# Altium PCB QS30.PcbDoc (part 1 of 2)
Units mil, origin at the board's own origin, x right, y up, seen from the top; angles counter-clockwise.
Board outline 3448.82 x 1825 mil, 2 copper layers (Top Layer, Bottom Layer); 106 components, 114 nets, 350 pads, 148 vias.
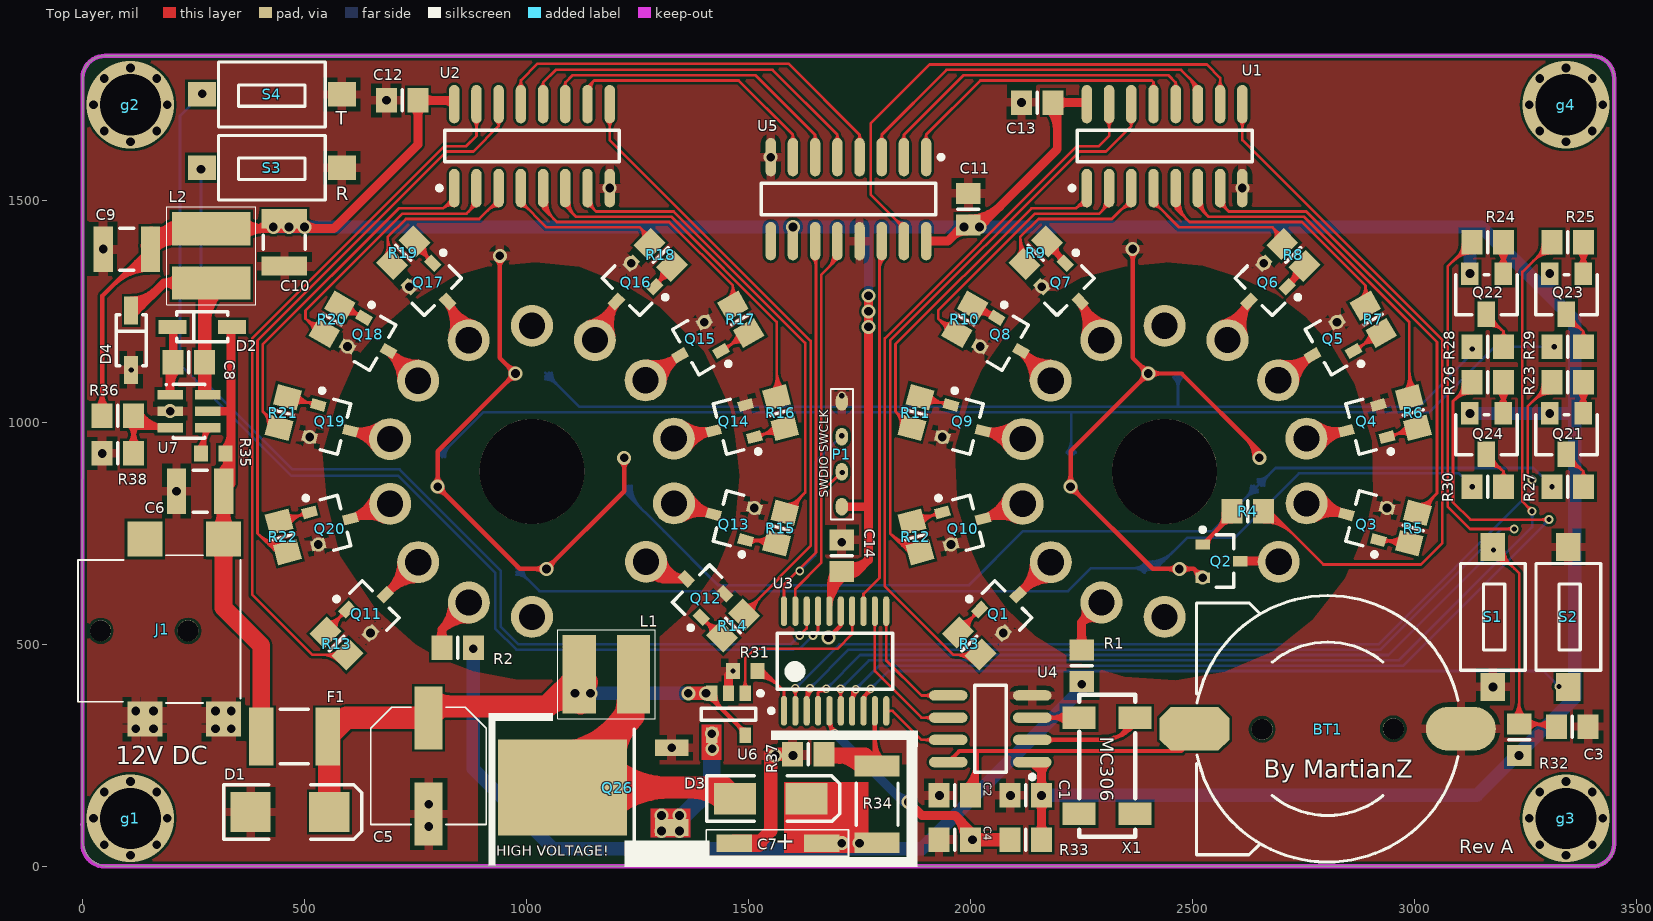
[diagram p0: Top Layer view]
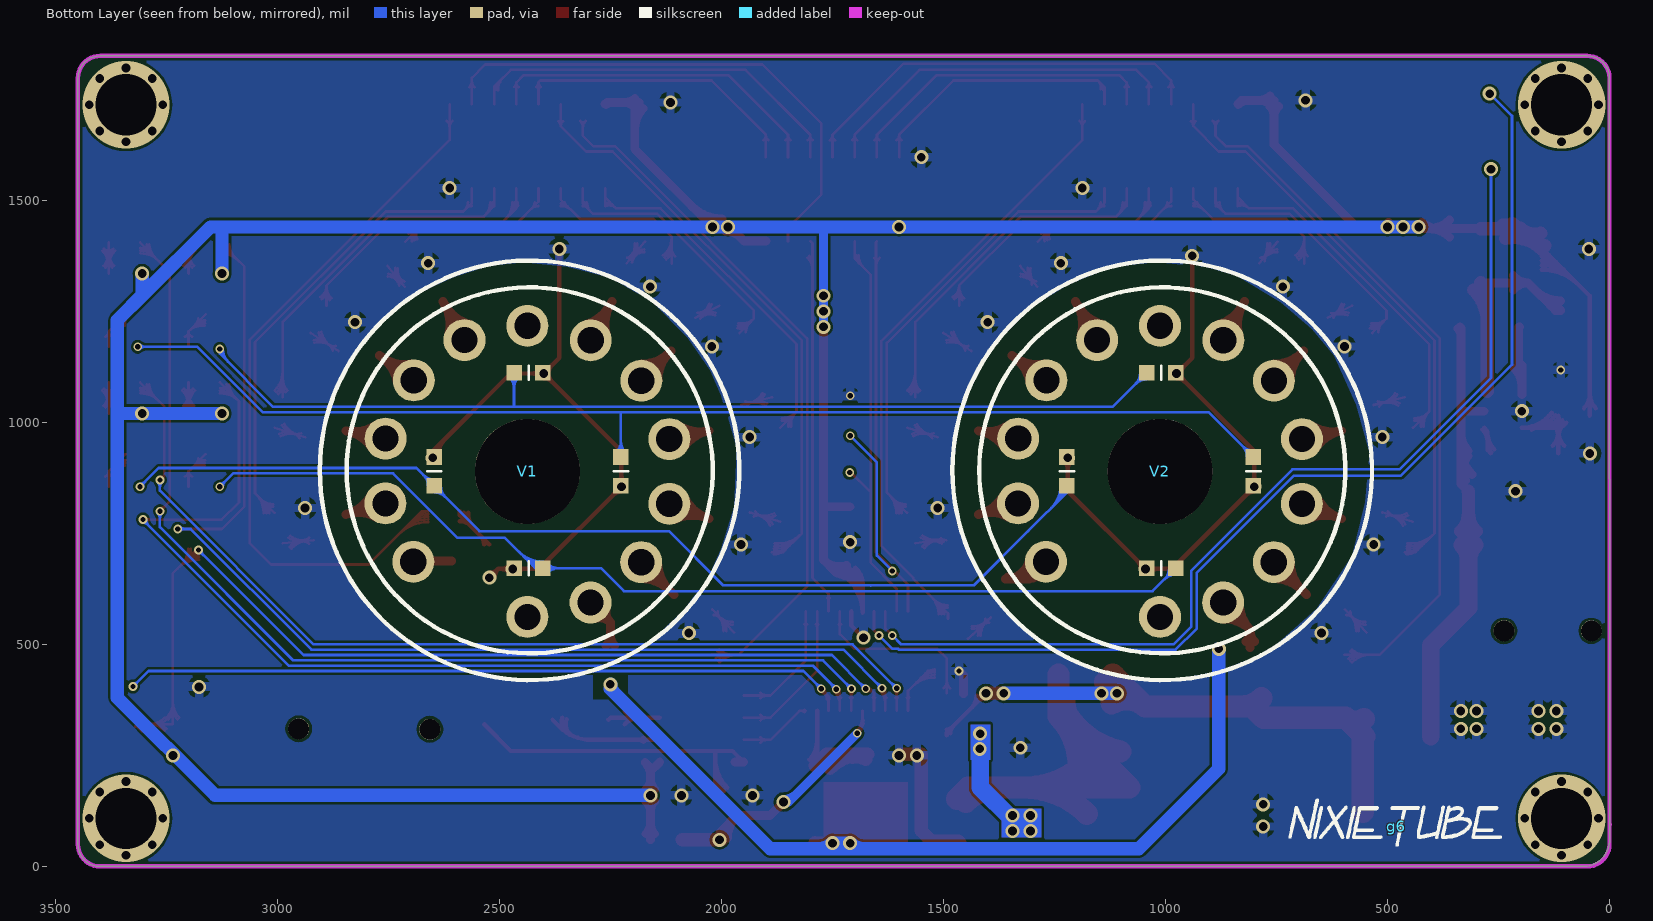
[diagram p1: Bottom Layer view, seen from below]

## Layer stack, top to bottom
Top Layer: signal copper 1.4
Dielectric: dielectric 12.6, FR-4, Dk 4.8
Bottom Layer: signal copper 1.4

## Board outline
0.32,1685 0.32,1775 cw(c50.32,1775) 50.32,1825 3398.82,1825 cw(c3398.82,1775) 3448.82,1775 3448.82,50 cw(c3398.82,50) 3398.82,0 60,0 cw(c60,60) 0,60

## Design rules (kind name [scope] priority, off if disabled: settings)
Clearance [All] p1: gap=6
HoleSize [All] p1: absolutevalues=TRUE maxlimit=300 minlimit=1 maxpercent=80.000 minpercent=20.000
HoleToHoleClearance [All] p1: gap=3 allowstackedmicrovias=TRUE
MinimumSolderMaskSliver [All] p1: minsoldermaskwidth=1
PolygonConnect [All] p1: connectstyle=Relief reliefconductorwidth=20 reliefentries=4 polygonreliefangle="90 Angle" airgapwidth=10
RoutingVias [All] p1: holewidth=28 width=50 viastyle="Through Hole" minholewidth=28 minwidth=50 maxholewidth=28 maxwidth=50
SilkToSilkClearance [All] p1: silktosilkclearance=0
SilkscreenOverComponentPads [All] p1: minsilkscreentomaskgap=0
SolderMaskExpansion [All] p1: expansion=4
Width [All] p1: maxlimit=100 minlimit=6 preferedwidth=10
23 further rules are at their usual default settings.

## Classes and differential pairs
component class QS30-MCU: BT1 C1 C2 C3 C4 C10 C11 C12 C13 C14 P1 R31 R32 R33 S1 S2 S3 S4 U3 U4 X1
component class QS30-Main: Q1 Q2 Q3 Q4 Q5 Q6 Q7 Q8 Q9 Q10 Q11 Q12 Q13 Q14 Q15 Q16 Q17 Q18 Q19 Q20 Q21 Q22 Q23 Q24 R1 R2 R3 R4 R5 R6 R7 R8 R9 R10 R11 R12 R13 R14 R15 R16 R17 R18 R19 R20 R21 R22 R23 R24 R25 R26 R27 R28 R29 R30 U1 U2 U5 V1 V2
component class QS30-HV: C5 C6 C7 C8 C9 D1 D2 D3 D4 F1 g1 g2 g3 g4 g6 J1 L1 L2 Q26 R34 R35 R36 R37 R38 U6 U7

## Components (designator, comment, footprint, x,y, rotation, side; value= is the part's Value field where it differs from the comment)
BT1 "Battery" BAT 2504.25,310 r90 top
C1 "Cap" 6-0805_N 2124.25,160 r180 top
C2 "Cap" 6-0805_N 1964.25,160 r180 top
C3 "100nF" 6-0805_N 3355,315 r180 top
C4 "Cap" 6-0805_N 1964.25,60 r0 top
C5 "EL" 220UF_16V_SMD_CAP 850.39,354.33 r0 top
C6 "" C1210 265,845 r180 top
C7 "Cap Pol1" "C10.2 - SMD" 1664.88,52.52 r180 top
C8 "Cap" 6-0805_N 240,1135 r180 top
C9 "Cap" C1210 100,1390 r0 top
C10 "Cap" C1210 455,1405 r90 top
C11 "Cap" 6-0805_N 1995,1480 r270 top
C12 "Cap" 6-0805_N 720,1725 r0 top
C13 "Cap" 6-0805_N 2150,1720 r0 top
C14 "Cap" 6-0805_N 1710,700 r270 top
D1 "SMBJ13CA" SMB 467.4,122.52 r0 top
D2 "B230A" SOD123 270,1215 r180 top
D3 "FR107" DSO-C2/X1.8 1549.88,152.52 r0 top
D4 "B230A" SOD123 110,1185 r90 top
F1 "Fuse 2" 1812 477.4,292.52 r0 top
g1 "g固定过孔" 固定过孔 108.27,108.27 r0 top
g2 "g固定过孔" 固定过孔 108.27,1715 r0 top
g3 "g固定过孔" 固定过孔 3340.55,108.27 r0 top
g4 "g固定过孔" 固定过孔 3340.55,1715 r0 top
g6 "g固定过孔" "PCBComponent_1 - duplicate3" 480,90 r180 bottom
J1 "KLD-0202-B" DC_JACK_SMT_4.0_1.7 -10,690 r270 top
L1 "GDCD4532" GDCD4532 1179.88,432.52 r0 top
L2 "CDRH6D38T125" GDCD4532 290,1375 r90 top
P1 "Header 4" SWD_DOWNLOAD 1710,810 r90 top
Q1 "MMBTA42" SOT-23B_L 2076.77,581.89 r45 top
Q2 "MMBTA42" SOT-23B_L 2564.88,687.52 r0 top
Q3 "MMBTA42" SOT-23B_L 2886.77,781.89 r165 top
Q4 "MMBTA42" SOT-23B_L 2886.77,991.89 r195 top
Q5 "MMBTA42" SOT-23B_L 2806.77,1171.89 r210 top
Q6 "MMBTA42" SOT-23B_L 2656.77,1301.89 r225 top
Q7 "MMBTA42" SOT-23B_L 2216.77,1301.89 r315 top
Q8 "MMBTA42" SOT-23B_L 2076.77,1181.89 r330 top
Q9 "MMBTA42" SOT-23B_L 1986.77,991.89 r345 top
Q10 "MMBTA42" SOT-23B_L 1986.77,771.89 r15 top
Q11 "MMBTA42" SOT-23B_L 652.36,581.89 r45 top
Q12 "MMBTA42" SOT-23B_L 1389.88,617.52 r135 top
Q13 "MMBTA42" SOT-23B_L 1462.36,781.89 r165 top
Q14 "MMBTA42" SOT-23B_L 1462.36,991.89 r195 top
Q15 "MMBTA42" SOT-23B_L 1382.36,1171.89 r210 top
Q16 "MMBTA42" SOT-23B_L 1232.36,1301.89 r225 top
Q17 "MMBTA42" SOT-23B_L 792.36,1301.89 r315 top
Q18 "MMBTA42" SOT-23B_L 652.36,1181.89 r330 top
Q19 "MMBTA42" SOT-23B_L 562.36,991.89 r345 top
Q20 "MMBTA42" SOT-23B_L 562.36,771.89 r15 top
Q21 "9012 8550" SOT-23 3379.25,1020 r180 top
Q22 "9012 8550" SOT-23 3199.25,1335 r180 top
Q23 "9012 8550" SOT-23 3379.25,1335 r180 top
Q24 "9012 8550" SOT-23 3199.25,1020 r180 top
Q26 "IRFR220" TO-252AA_N 1149.88,177.52 r180 top
R1 "Res1" 6-0805_N 2250,452 r90 top
R2 "Res1" 6-0805_N 844.88,492.52 r180 top
R3 "Res1" 6-0805_N 1996.77,501.89 r315 top
R4 "Res1" 6-0805_N 2624.25,800 r0 top
R5 "Res1" 6-0805_N 2996.77,761.89 r75 top
R6 "Res1" 6-0805_N 2996.77,1021.89 r105 top
R7 "Res1" 6-0805_N 2906.77,1231.89 r120 top
R8 "Res1" 6-0805_N 2726.77,1376.89 r135 top
R9 "Res1" 6-0805_N 2146.77,1381.89 r225 top
R10 "Res1" 6-0805_N 1986.77,1231.89 r240 top
R11 "Res1" 6-0805_N 1876.77,1021.89 r255 top
R12 "Res1" 6-0805_N 1876.77,741.89 r285 top
R13 "Res1" 6-0805_N 572.36,501.89 r315 top
R14 "Res1" 6-0805_N 1464.88,542.52 r45 top
R15 "Res1" 6-0805_N 1572.36,761.89 r75 top
R16 "Res1" 6-0805_N 1572.36,1021.89 r105 top
R17 "Res1" 6-0805_N 1482.36,1231.89 r120 top
R18 "Res1" 6-0805_N 1302.36,1376.89 r135 top
R19 "Res1" 6-0805_N 722.36,1381.89 r225 top
R20 "Res1" 6-0805_N 562.36,1231.89 r240 top
R21 "Res1" 6-0805_N 452.36,1021.89 r255 top
R22 "Res1" 6-0805_N 452.36,741.89 r285 top
R23 "Res1" 6-0805_N 3344.25,1090 r0 top
R24 "Res1" 6-0805_N 3164.25,1405 r0 top
R25 "Res1" 6-0805_N 3344.25,1405 r0 top
R26 "Res1" 6-0805_N 3164.25,1090 r0 top
R27 "Res1" 6-0805_N 3344.25,855 r0 top
R28 "Res1" 6-0805_N 3164.25,1170 r0 top
R29 "Res1" 6-0805_N 3344.25,1170 r0 top
R30 "Res1" 6-0805_N 3164.25,855 r0 top
R31 "Res1" 1608[0603] 1492.28,440 r180 top
R32 "100K" 6-0805_N 3235,285 r270 top
R33 "" 6-0805_N 2124.25,60 r180 top
R34 "2010W2J0474T4S/2010" 12Z-2010 1789.25,140 r270 top
R35 "0805" 1608[0603] 295,930 r0 top
R36 "0805" 6-0805_N 80,1015 r180 top
R37 "0805" 6-0805_N 1634.88,252.52 r0 top
R38 "0805" 6-0805_N 80,930 r0 top
S1 "SW-PB" AJ3X6 3294.25,640 r270 top
S2 "SW-PB" AJ3X6 3464.25,640 r270 top
S3 "SW-PB" aj3X6 505,1455 r180 top
S4 "SW-PB" aj3X6 505,1620 r180 top
U1 "M74HC4028M1R" SO16_N 2436.77,1621.89 r90 top
U2 "M74HC4028M1R" SO16_N 1012.36,1621.89 r90 top
U3 "STM32F030F4P6" TSSOP20_N 1694.88,462.52 r90 top
U4 "DS1302ZN" SOIC8N_N 2044.25,310 r180 top
U5 "SN74HC595D" D016_N 1724.88,1502.52 r270 top
U6 "SC1301" SOT23-5_L 1454.88,342.52 r270 top
U7 "MP2359" SOT-23_A 240,1025 r270 top
V1 "QS30" QS30 2436.77,561.89 r180 bottom
V2 "QS30" QS30 1012.36,561.89 r180 bottom
X1 "32.768K" MC306 2244.25,335 r270 top

## Footprints (in the part's own frame and the unit in brackets; to place one, negate y for a bottom-side part, rotate by r counter-clockwise, add the part's x,y. Pads: shape width x height; smd on the part's side, far side on the other; paste and mask are expansions set on the pad)
6-0805_N [mm] "Chip Resistor, Body 2.0x1.2mm, IPC Medium Density"
  rect 1.2x1.4 smd: 1(-0.9,0) 2(0.9,0)
  silkscreen extent 0,-0.6 0,0.6, body extent -1.07,-0.7 1.07,0.7, height 0.7
12Z-2010 [mm] "Chip Resistor, Body 5.0x2.5mm, IPC High Density"
  rect 1.2x2.6 smd: 1(-2.2,0) 2(2.2,0)
  silkscreen extent -1.2,-1.2 1.2,1.2, body extent -2.58,-1.33 2.58,1.33, height 0.9
220UF_16V_SMD_CAP [mm]
  rect 1.6x3.6 smd: 1(-1.8,-0.5) 2(-1.8,-6)
  silkscreen extent -5.1,-6.6 1.5,0.1
1608[0603] [mm] "Chip Capacitor, Body 1.6x0.8mm, IPC High Density"
  rect 0.8x0.9 smd: 1(-0.7,0) 2(0.7,0)
  body extent -0.87,-0.48 0.87,0.48, height 1.3
1812 [mm] "Chip Capacitor, Body 4.5x3.2mm, IPC High Density"
  rect 1.4x3.3 smd: 1(-1.9,0) 2(1.9,0)
  silkscreen extent -0.8,-1.55 0.8,1.55, body extent -2.4,-1.7 2.4,1.7, height 1.4
AJ3X6 [mm]
  rect 1.6x1.4 smd: 1(-2.012,-3.002) 2(5.988,-3.002)
  silkscreen extent -1.06,-4.85 5.04,-1.15
aj3X6 [mm]
  rect 1.6x1.4 smd: 1(-2.012,-3.002) 2(5.988,-3.002)
  silkscreen extent -1.06,-4.85 5.04,-1.15
BAT [mm]
  oct 2.5x4 smd: 1(-0.002,0.005)
  oval 2.5x4 smd: 2(-0.002,-15.235)
  round 1.2 hole 1.2 unplated: ""(-0.027,-3.865) ""(-0.002,-11.365)
  silkscreen extent -7.62,-15.07 7.62,-0.11, body extent -6.94,-14.35 7,-0.38, height 1
"C10.2 - SMD" [mil]
  rect 79.02x39.65 smd: 1(0.14,0.12) 2(197.14,0.12)
  silkscreen extent -60,-30 260,30
C1210 [mm] "Chip Capacitor, Body 3.2x2.5mm, IPC High Density"
  rect 1.1x2.6 smd: 1(-1.35,0) 2(1.35,0)
  silkscreen extent -0.4,-1.2 0.4,1.2, body extent -1.7,-1.35 1.7,1.35, height 1.3
D016_N [mm] "SOIC, 16-Leads, Body 9.9x3.9mm, Pitch 1.27mm, IPC Medium Density"
  oval 2.2x0.6 smd: 1(-2.4,4.445) 2(-2.4,3.175) 3(-2.4,1.905) 4(-2.4,0.635) 5(-2.4,-0.635) 6(-2.4,-1.905) 7(-2.4,-3.175) 8(-2.4,-4.445) 9(2.4,-4.445) 10(2.4,-3.175) 11(2.4,-1.905) 12(2.4,-0.635) 13(2.4,0.635) 14(2.4,1.905) 15(2.4,3.175) 16(2.4,4.445)
  silkscreen extent -2.52,-5 0.9,5.42, body extent -1.95,-4.95 1.95,4.95, height 1.75
DC_JACK_SMT_4.0_1.7 [mm]
  round 1.2 hole 1.2 unplated: 0(4.05,6.3) 0(4.05,1.3)
  rect 2x2 smd: 1(-1.2,8.325) 1(-1.2,3.825) 2(9.1,3.825) 3(9.1,8.325)
  silkscreen extent -0.28,0 8.18,9.3
DSO-C2/X1.8 [mm] "DO-214-AC/SMA; 2 C-Bend Leads; Body 5 x 2.7 mm, inc. leads (LxW)"
  rect 2.4x1.8 smd: 1(-2.05,0) 2(2.05,0)
  silkscreen extent -3.65,-1.3 3.95,1.3
GDCD4532 [mm]
  rect 1.9x4.5 smd: 1(-1.55,0) 2(1.55,0)
  silkscreen extent -2.79,-2.54 2.79,2.54
MC306 [mm]
  rect 1.3x1.9 smd: 1(0,0) 2(5.5,0) 3(5.5,3.2) 4(0,3.2)
  silkscreen extent -1.3,0 6.8,3.2
"PCBComponent_1 - duplicate3" [mil]
  silkscreen extent -243,-45 237,61
QS30 [mm]
  round 6 hole 6 unplated: 0(0,8.325)
  round 2.4 hole 1.5: 1(0,0) 2(3.61,0.824) 3(6.506,3.131) 4(8.115,6.467) 5(8.118,10.17) 6(6.515,13.508) 7(3.622,15.821) 8(0,16.65) 9(-3.598,15.832) 10(-6.498,13.529) 11(-8.112,10.196) 12(-8.121,6.493) 13(-6.523,3.152)
  rect 0.889x0.889 smd: 14(-5.324,7.493) 15(-5.324,9.144) 16(-0.762,13.96) 17(0.889,13.96) 18(5.344,9.144) 19(5.344,7.493) 20(0.889,2.784) 21(-0.762,2.784)
  silkscreen extent -11.87,-3.62 12.12,20.38
SMB [mm] "DO-214-AA/SMB; 2 C-Bend Leads; Body 5.3 x 3.6 mm, inc. leads (LxW)"
  rect 2.3x2.3 smd: 1(-2.25,0) 2(2.25,0)
  silkscreen extent -3.8,-1.55 4.1,1.55
SO16_N [mm] "SOIC, 16-Leads, Body 9.9x3.9mm, Pitch 1.27mm, IPC Medium Density"
  oval 2.2x0.6 smd: 1(-2.4,4.445) 2(-2.4,3.175) 3(-2.4,1.905) 4(-2.4,0.635) 5(-2.4,-0.635) 6(-2.4,-1.905) 7(-2.4,-3.175) 8(-2.4,-4.445) 9(2.4,-4.445) 10(2.4,-3.175) 11(2.4,-1.905) 12(2.4,-0.635) 13(2.4,0.635) 14(2.4,1.905) 15(2.4,3.175) 16(2.4,4.445)
  silkscreen extent -2.52,-5 0.9,5.42, body extent -1.95,-4.95 1.95,4.95, height 1.75
SOD123 [mm] "SOD-123; 2 Leads; Body 2.7 x 1.6 mm, (LxW)"
  rect 1.6x0.8 smd: 1(-1.7,0) 2(1.7,0)
  silkscreen extent -1.45,-0.85 1.45,0.85
SOIC8N_N [mm] "SOIC, 8-Leads, Body 4.9x3.9mm, Pitch 1.27mm, IPC Medium Density"
  oval 2.2x0.6 smd: 1(-2.4,1.905) 2(-2.4,0.635) 3(-2.4,-0.635) 4(-2.4,-1.905) 5(2.4,-1.905) 6(2.4,-0.635) 7(2.4,0.635) 8(2.4,1.905)
  silkscreen extent -2.53,-2.5 0.9,2.88, body extent -2,-2.5 2,2.5, height 1.75
SOT23-5_L [mm] "SOT23, 5-Leads, Body 2.9x1.6mm, Pitch 0.95mm,"
  rect 0.9x0.65 smd: 1(-1.2,0.95) 2(-1.2,0) 3(-1.2,-0.95) 4(1.2,-0.95) 5(1.2,0.95)
  silkscreen extent -1.32,-1.55 0.35,1.95, body extent -0.9,-1.55 0.9,1.55, height 1.45
SOT-23 [mm]
  rect 1x1.29 smd: 1(0,0) 2(1.905,0)
  rect 1x1.47 smd: 3(0.965,2.332)
  silkscreen extent -0.81,0.07 2.72,2.36
SOT-23_A [mm] "SOT-457/SC-74; 6 Leads; Body 3.1 x 3 mm, inc. leads (LxW max)"
  rect 0.55x1.45 smd: 1(-0.95,-1.075) 2(0,-1.075) 3(0.95,-1.075) 4(0.95,1.075) 5(0,1.075) 6(-0.95,1.075)
  silkscreen extent -1.57,-1.35 1.55,0.9
SOT-23B_L [mm] "SOT23, 3-Leads, Body 2.9x1.3mm, Pitch 0.95mm, Lead Span 2.4mm, IPC High Density"
  rect 0.85x0.6 smd: 1(-1.075,0.95) 2(-1.075,-0.95) 3(1.075,0)
  silkscreen extent -1.2,-1.5 0.7,1.92, body extent -0.7,-1.5 0.7,1.5, height 1.14
SWD_DOWNLOAD [mm]
  oval 1x0.7 smd: 1(0,0) 2(2,0) 3(4,0) 4(6,0)
  silkscreen extent -0.74,-0.64 6.73,0.64
TO-252AA_N [mm] "D-PAK, 4-Leads, Body 6.1x6.5mm, Pitch 2.28mm, Lead Span 9.9mm, IPC Medium Density"
  rect 1.9x0.95 smd: 1(-4.5,2.28) 3(-4.5,-2.28)
  rect 7.4x5.5 smd: 4(1.75,0)
  silkscreen extent -4.62,-3.35 -2.35,3.43, body extent -2.25,-3.37 4.1,3.37, height 2.38
TSSOP20_N [mm] "TSOP, 20-Leads, Bod"
  oval 1.7x0.35 smd: 1(-2.85,2.925) 2(-2.85,2.275) 3(-2.85,1.625) 4(-2.85,0.975) 5(-2.85,0.325) 6(-2.85,-0.325) 7(-2.85,-0.975) 8(-2.85,-1.625) 9(-2.85,-2.275) 10(-2.85,-2.925) 11(2.85,-2.925) 12(2.85,-2.275) 13(2.85,-1.625) 14(2.85,-0.975) 15(2.85,-0.325) 16(2.85,0.325) 17(2.85,0.975) 18(2.85,1.625) 19(2.85,2.275) 20(2.85,2.925)
  silkscreen extent -2.97,-3.3 1.6,3.77, body extent -2.25,-3.3 2.25,3.3, height 1.1
固定过孔 [mil]

## Part data
BT1: "Multicell Battery"
C1 C2 C4 C8 C9 C10 C11 C12 C13 C14: "Capacitor"
C3: library part CAP, "Capacitor"
C5 C6: library part "Cap Pol1", "Polarized Capacitor (Radial)"
C7: "Pol"
D1: library part "D Zener", "Zener Diode"
D2 D4: library part "D Schottky", "Schottky Diode"
D3: library part "Diode 1N914", "High Conductance Fast Diode"
F1: "Fuse"
J1: "Low Voltag"
L1: library part Inductor, "Inductor"
P1: library part He
Q26: "HEXFET Power MOSFET"
R1 R2 R3 R4 R5 R6 R7 R8 R9 R10 R11 R12 R13 R14 R15 R16 R17 R18 R19 R20 R21 R22 R23 R24 R25 R26 R27 R28 R29 R30 R31: "Resistor"
R32: library part res1, "Resistor"
R33 R34 R35 R36 R37 R38: library part Res1, "Resistor"
S1 S2 S3 S4: "Switch"
U1 U2: "BCD-to-Decimal Decoder"
U4: "Trickle Charge Timekeeping Chip"
U5: "8-Bit Shift Register with 3-State Output Registers"
X1: library part XTAL, "Crystal Oscillator"

## Via types
v1: diameter 31.5, hole 19.68, Top Layer to Bottom Layer, tented both sides, 87 vias
v2: diameter 19.68, hole 19.68, Top Layer to Bottom Layer, 32 vias
v3: diameter 19.68, hole 11.81, Top Layer to Bottom Layer, tented both sides, 25 vias
v4: diameter 196.85, hole 137.8, Top Layer to Bottom Layer, 4 vias

## Nets (pads, with @x,y where several pads share a name; then routed paths per layer and width w, separated by ;. In a path a pad name is that pad's centre, name@x,y a point inside that pad or via, vN(x,y) a via of type N, cw(c..) or ccw(c..) an arc to the next point about the centre after c; other vN are vias at no path point)
3V3: C1.1 C9.2 C10.2 C11.2 C12.2 C13.2 C14.2 L2.2 P1.1 Q21.2 Q22.2 Q23.2 Q24.2 R32.2 R33.1 R36.2 U1.16 U2.16 U3.16 U4.1 U5.10 U5.16 | length 10855.6
  Top Layer w10: R36.2@31.4,1032.1 ccw(c-0.39,1063.89) 44.57,1063.89 ccw(c89.52,1063.89) R36.2@57.73,1032.1 ; R36.2@44.57,1015 44.57,1284.57 150,1390 C9.2@153.15,1390 ; 68.94,1308.94 cw(c153.15,1224.72) C9.2@153.15,1343.82 ; 86.01,1326.01 cw(c153.15,1258.87) C9.2@153.15,1353.82 ; 103.08,1343.08 cw(c153.15,1293.01) C9.2@153.15,1363.82 ; 120.15,1360.15 cw(c153.15,1327.15) C9.2@153.15,1373.82 ; C9.2@137.22,1377.22 cw(c153.15,1361.29) C9.2@153.15,1383.82 ; U3.16@1682.09,571.58 cw(c1786.24,571.58) C14.2@1718.22,650.46 ; U3.16@1682.09,574.72 1682.09,636.65 ; U3.16@1682.09,593.41 cw(c1767.42,593.41) C14.2@1711.69,658.04 ; 1682.09,615.24 cw(c1748.6,615.24) C14.2@1705.16,665.61 ; 1682.09,637.07 cw(c1729.78,637.07) C14.2@1698.63,673.18 ; 1686.51,609.94 cw(c1675.38,612.92) 1681.14,602.94 ccw(c1665.73,629.63) 1695.5,621.65 ; C14.2@1688.12,659.58 cw(c1665.45,653.29) 1682.09,636.65 ; C14.2@1705.51,645.95 ccw(c1704.57,614.17) 1682.09,636.65 ; C14.2@1710,664.57 1682.09,636.65
  Top Layer w20: L2.2@290,1436.02 566.02,1436.02 755.43,1625.43 C12.2@755.43,1725 828.74,1725 U2.16@837.36,1716.38 ; L2.2@360.56,1416.65 cw(c407.33,1369.87) 407.33,1436.02 cw(c407.33,1502.18) L2.2@360.56,1455.4 ; 388.27,1436.02 ccw(c388.27,1484.05) C10.2@422.23,1450.09 ; 406.52,1436.02 ccw(c406.52,1463.48) C10.2@425.94,1444.06 ; C10.2@407.01,1441.3 cw(c413.78,1429.59) C10.2@425.16,1436.9 ; C10.2@434.06,1444.06 ccw(c453.48,1463.48) v1@453.48,1436.02 ; v1@441.52,1436.02 ccw(c441.52,1463.48) C10.2@460.94,1444.06 ; C10.2@469.06,1444.06 ccw(c488.48,1463.48) v1@488.48,1436.02 ; v1@476.52,1436.02 ccw(c476.52,1463.48) C10.2@495.94,1444.06 ; C10.2@497.77,1450.09 ccw(c531.73,1484.05) 531.73,1436.02 ; C10.2@504.06,1444.06 ccw(c523.48,1463.48) 523.48,1436.02 ; C12.2@745.8,1711.43 cw(c722.55,1688.18) 755.43,1688.18 cw(c788.32,1688.18) C12.2@765.07,1711.43 ; C12.2@765.07,1715.37 cw(c788.32,1692.11) 788.32,1725 cw(c788.32,1757.89) C12.2@765.07,1734.63 ; 812.17,1725 cw(c812.17,1691.19) U2.16@836.08,1715.1 ; C14.2@1710,664.57 1744.57,664.57 ; P1.1@1710,810 1770,810 ; C14.2@1711.97,658.5 ccw(c1722.58,691.22) 1746.9,666.9 ; C14.2@1718.14,677.53 ccw(c1733.88,726.12) 1770,690 ; C14.2@1724.05,655.44 cw(c1744.57,636.95) 1744.57,664.57 ; C14.2@1724.05,673.69 ccw(c1744.57,692.19) 1744.57,664.57 ; v1(1770,1285) v1(1770,1250) v1(1770,1215) 1770,810 ; U5.16@1899.88,1408.03 1948.46,1408.03 1985,1444.57 1989.57,1440 v1(2020,1440) ; 1957.46,1417.03 cw(c1991.06,1383.42) C11.2@1991.06,1430.94 ; 1967.39,1426.96 cw(c1985,1409.35) C11.2@1985,1434.25 ; C11.2@1987.87,1444.98 ccw(c2003.96,1472.83) C11.2@2012.28,1441.76 ; C11.2@1989.06,1435.94 cw(c2009.9,1415.1) C11.2@2009.9,1444.57 ; C11.2@1995,1444.57 v1@2024.57,1444.57 ; C11.2@1995.1,1444.57 cw(c1995.1,1415.1) C11.2@2015.94,1435.94 ; C11.2@1998.94,1438.19 ccw(c1998.94,1484.67) 2031.8,1451.8 ; C11.2@1998.94,1458.19 ccw(c1998.94,1552.95) 2065.94,1485.94 ; C11.2@2010.23,1436.95 cw(c2024.57,1427.27) v1@2024.57,1444.57 ; C11.2@2010.23,1452.19 ccw(c2024.57,1461.86) v1@2024.57,1444.57 ; v1@2025.74,1439.68 cw(c2042.21,1438.76) 2033.96,1453.05 ; U4.1@2138.74,235 2159.68,214.06 v1(2159.68,160) R33.1@2159.68,60 ; R33.1@2150.05,73.57 ccw(c2126.8,96.82) 2159.68,96.82 ccw(c2192.57,96.82) R33.1@2169.32,73.57 ; C1.1@2150.05,146.43 cw(c2126.8,123.18) 2159.68,123.18 cw(c2192.57,123.18) C1.1@2169.32,146.43 ; C1.1@2150.05,173.57 ccw(c2126.8,196.82) 2159.68,196.82 ccw(c2192.57,196.82) C1.1@2169.32,173.57 ; 2159.68,205.15 cw(c2200.08,205.15) U4.1@2171.52,233.72 ; 2159.68,211.55 cw(c2186.3,211.55) U4.1@2171.26,233.51 ; C13.2@2175.8,1706.43 cw(c2129.45,1660.08) 2195,1660.08 ; C13.2@2185.43,1720 C13.2@2195,1720 ; C13.2@2195,1725 C13.2@2195,1720 ; C13.2@2195.07,1710.37 cw(c2218.32,1687.11) 2218.32,1720 cw(c2218.32,1752.89) C13.2@2195.07,1729.63 ; 2248.65,1720 cw(c2248.65,1703.26) U1.16@2260.49,1715.1 ; U1.16@2261.77,1716.38 2258.15,1720 C13.2@2195,1720 ; 1744.57,664.57 1770,690 ; 1770,690 1770,810 ; v1@2024.57,1444.57 2195,1615 C13.2@2195,1720
  Top Layer w30: C9.2@145.61,1397.43 ccw(c151.72,1415.35) C9.2@165.11,1401.96 ; C9.2@155.3,1425.83 ccw(c169.05,1466.15) 199.17,1436.02 ; 192.32,1429.17 cw(c229.54,1391.94) L2.2@240.38,1443.46 ; L2.2@219.63,1424.47 ccw(c199.18,1412.15) 199.18,1436.02 ; L2.2@219.63,1447.58 cw(c199.18,1459.9) 199.18,1436.02 ; L2.2@234.21,1414.1 ccw(c215.93,1327.23) C9.2@153.15,1390 199.17,1436.02 ; L2.2@290,1436.02 199.17,1436.02
  Bottom Layer w20: v1(1770,1215) v1(1770,1250) v1(1770,1285) 1770,1440
  Bottom Layer w30: v1(430,1440) v1(465,1440) v1(500,1440) v1(1600,1440) 1770,1440 v1(1985,1440) v1(2020,1440) 3130,1440 ; v1(2159.68,160) 3140,160 3360,380 3360,1020 ; v1(3124.25,1020) v1(3304.25,1020) 3360,1020 ; v1(3124.25,1335) 3124.25,1434.25 3130,1440 ; v1(3304.25,1335) 3304.25,1294.25 3300,1290 ; 3130,1440 3150,1440 3300,1290 ; 3300,1290 3360,1230 3360,1020
  other v1: 3235,249.57
12V: C5.1 D1.2 F1.2 L1.1 U6.3 U6.5 | length 1654.9
  Top Layer w10: v1@1404.25,379.02 cw(c1404.25,353.07) 1422.6,371.42 cw(c1440.95,389.76) U6.3@1415,389.76 ; v1(1404.25,389.76) 1492.28,301.73 U6.5@1492.28,295.28 ; U6.3@1425.28,384.84 ccw(c1464.15,384.84) 1436.66,357.35 ; 1477.89,316.13 cw(c1461.96,300.2) U6.5@1484.49,300.2 ; U6.5@1481.6,312.42 ccw(c1492.28,323.1) U6.5@1492.28,307.99
  Top Layer w30: v1(1364.49,389.76) v1(1404.25,389.76)
  Top Layer w50: F1.2@553.76,331.95 ccw(c572.51,356.47) 594.33,334.65 ; D1.2@555.98,122.52 555.98,288.74 ccw(c552.2,288.74) F1.2@552.2,292.52 594.33,334.65 ; C5.1@784.12,378.61 ccw(c829.05,423.54) 829.05,360 ; 1068.29,381.95 cw(c1109.49,340.75) L1.1@1109.49,399.02 ; L1.1@1094.63,408.29 cw(c1119.79,383.13) L1.1@1136.17,414.71 ; L1.1@1100.24,389.76 cw(c1158.5,389.76) L1.1@1117.3,430.96 ; L1.1@1101.11,385.84 ccw(c1133.53,401.02) L1.1@1121.34,367.36 ; L1.1@1113.15,370.33 ccw(c1086.8,319.54) 1046.34,360 ; L1.1@1118.86,432.52 1046.34,360 ; 594.33,334.65 C5.1@779.53,334.65 804.88,360 1046.34,360
  Bottom Layer w30: v1@1109.25,390 v1(1109.49,389.76) v1(1364.49,389.76)
  other v1: 1144.25,389.76
170V: C7.1 D3.2 R1.1 R2.1 R34.2 | length 2187.7
  Top Layer w30: C7.1@1664.74,52.4 v1(1710,52.4) v1(1750,52.4) 1788.27,52.4 R34.2@1789.25,53.39
  Bottom Layer w30: v1(880,490) 880,220 1060,40 1890,40 v1@2250,400 ; 1678.25,40 ccw(c1678.25,84.15) v1@1709.47,52.93 ; v1(1710,52.4) v1(1750,52.4) ; v1@1710.53,52.93 ccw(c1741.75,84.15) v1@1741.75,40 ; v1@1718.25,40 ccw(c1718.25,84.15) v1@1749.47,52.93 ; v1@1750.53,52.93 ccw(c1781.75,84.15) 1781.75,40 ; 2241.65,391.65 ccw(c2223.3,410) v1@2249.25,410
  other v1: 2250,410
595_DS: U3.13 U5.14 | length 914.5
  Top Layer w6: U3.13@1756.11,604.05 ccw(c1749.47,610.69) 1758.86,610.69 ccw(c1768.25,610.69) U3.13@1761.61,604.05 ; U3.13@1758.86,574.72 1758.86,613.86 1794.77,649.77 1794.77,1402.92 U5.14@1799.88,1408.03 ; 1794.77,1342.93 cw(c1833.49,1342.93) U5.14@1806.11,1370.31 ; 1794.77,1357.41 cw(c1819.01,1357.41) U5.14@1801.87,1374.55
595_SHCP: P1.3 U3.20 U5.11 | length 1241.8
  Top Layer w6: U3.20@1579.72,574.72 1579.72,634.72 1651.88,706.88 1651.88,1406.03 U5.11@1649.88,1408.03 ; U5.11@1643.65,1370.31 cw(c1623.78,1350.44) 1651.88,1350.44 ; 1651.88,1360.09 cw(c1666.33,1360.09) U5.11@1656.11,1370.31
  Bottom Layer w6: v3(1615,665) 1650,700 1650,910 v3(1710,970)
595_STCP: P1.2 U3.19 U5.12 | length 990.1
  Top Layer w6: U3.19@1605.32,574.72 1605.32,625.32 1663.88,683.88 1663.88,842.62 ; 1679.17,1347.81 ccw(c1650.45,1376.54) U5.12@1691.07,1376.54 ; 1689.42,1358.05 ccw(c1670.93,1376.54) U5.12@1697.07,1376.54 ; U5.12@1699.88,1408.03 1699.88,1368.52 1663.88,1332.52 1663.88,842.62 ; P1.2@1710,888.74 1663.88,842.62
  other v3: 1711,887
DS1302_CE: U3.11 U4.5 | length 331.2
  Top Layer w6: U3.11@1807.29,545.4 cw(c1800.65,538.76) 1810.04,538.76 cw(c1819.43,538.76) U3.11@1812.79,545.4 ; U3.11@1810.04,574.72 1810.04,464.21 1889.25,385 U4.5@1949.76,385 ; U4.5@1912.04,378.77 ccw(c1897,363.73) 1897,385 ccw(c1897,406.27) U4.5@1912.04,391.23
DS1302_CLK: U3.10 U4.7 | length 214.9
  Top Layer w6: U3.10@1810.04,350.32 1823.94,350.32 1889.25,285 U4.7@1949.76,285 ; U3.10@1812.79,347.56 cw(c1819.43,340.92) 1819.43,350.32 cw(c1819.43,359.71) U3.10@1812.79,353.07 ; U4.7@1912.04,278.77 ccw(c1897,263.73) 1897,285 ccw(c1897,306.27) U4.7@1912.04,291.23
DS1302_IO: U3.12 U4.6 | length 391.8
  Top Layer w6: U3.12@1781.7,545.4 cw(c1775.06,538.76) 1784.45,538.76 cw(c1793.84,538.76) U3.12@1787.2,545.4 ; U3.12@1784.45,574.72 1784.45,439.8 1889.25,335 U4.6@1949.76,335 ; U4.6@1912.04,328.77 ccw(c1897,313.73) 1897,335 ccw(c1897,356.27) U4.6@1912.04,341.23
GND: BT1.2 C1.2 C2.2 C3.1 C4.1 C5.2 C6.2 C7.2 C9.1 C10.1 C11.1 C12.1 C13.1 C14.1 D1.1 D4.1 J1.2 J1.3 P1.4 Q1.2 Q2.2 Q3.2 Q4.2 Q5.2 Q6.2 Q7.2 Q8.2 Q9.2 Q10.2 Q11.2 Q12.2 Q13.2 Q14.2 Q15.2 Q16.2 Q17.2 Q18.2 Q19.2 Q20.2 Q26.3 R31.2 R37.1 R38.1 S1.2 S2.1 S3.1 S4.1 U1.8 U2.8 U3.15 U4.4 U5.8 U5.13 U6.2 U7.2 V1.15 V1.17 V1.19 V1.21 V2.15 V2.17 V2.19 V2.21 | length 3854.7
  Top Layer w10: v1@792.4,862.6 ccw(c774.05,880.95) 800,880.95 ccw(c825.95,880.95) v1@807.6,862.6 ; v1@800,844.25 cw(c800,818.3) 818.35,836.65 cw(c836.7,855) v1@810.75,855 ; v1@932.4,1367.4 cw(c914.05,1349.05) 940,1349.05 cw(c965.95,1349.05) v1@947.6,1367.4 ; v1(940,1375) 940,1145 v1(975,1110) 800,935 v1(800,855) 985,670 v1(1045,670) 1220,845 v1(1220,920) ; v1@975,1099.25 ccw(c975,1073.3) 956.65,1091.65 ccw(c938.3,1110) 964.25,1110 ccw(c938.3,1110) 956.65,1128.35 ccw(c975,1146.7) v1@975,1120.75 ; v1@1037.4,662.4 ccw(c1019.05,644.05) 1019.05,670 ccw(c1019.05,695.95) v1@1037.4,677.6 ; v1@1045,680.75 ccw(c1045,706.7) 1063.35,688.35 ccw(c1081.7,670) v1@1055.75,670 ; v1@1212.4,912.4 cw(c1194.05,894.05) 1220,894.05 cw(c1245.95,894.05) v1@1227.6,912.4 ; v1(1680,515) 1707.68,542.68 U3.15@1707.68,574.72 ; v1@2217.4,862.6 ccw(c2199.05,880.95) 2225,880.95 ccw(c2250.95,880.95) v1@2232.6,862.6 ; v1@2225,844.25 cw(c2225,818.3) 2243.35,836.65 cw(c2261.7,855) v1@2235.75,855 ; v1@2357.4,1382.4 cw(c2339.05,1364.05) 2365,1364.05 cw(c2390.95,1364.05) v1@2372.6,1382.4 ; v1(2365,1390) 2365,1145 v1(2400,1110) ; v1@2400,1099.25 ccw(c2400,1073.3) 2381.65,1091.65 ccw(c2363.3,1110) 2389.25,1110 ccw(c2363.3,1110) 2381.65,1128.35 ccw(c2400,1146.7) v1@2400,1120.75 ; v1@2407.6,1102.4 cw(c2425.95,1084.05) 2425.95,1110 cw(c2425.95,1135.95) v1@2407.6,1117.6 ; v1@2462.4,662.4 ccw(c2444.05,644.05) 2444.05,670 ccw(c2444.05,695.95) v1@2462.4,677.6 ; v1@2477.6,662.4 cw(c2495.95,644.05) 2495.95,670 cw(c2495.95,695.95) v1@2477.6,677.6 ; 2506.38,667.16 ccw(c2528.45,672.93) Q2.2@2522.75,650.84 ; Q2.2@2510.83,650.16 ccw(c2483,650.32) 2502.68,670 ; Q2.2@2511.81,650.12 ccw(c2485.86,650.12) 2504.21,668.47 ccw(c2522.56,686.81) Q2.2@2522.56,660.87 ; v1(2522.56,650.12) 2502.68,670 ; 2621.05,963.95 cw(c2577.09,920) v1@2639.25,920 ; 2638.12,946.88 cw(c2611.23,920) v1@2649.25,920 ; v1(2650,920) 2650,935 2475,1110 v1(2400,1110) ; v1(2400,1110) 2225,935 v1(2225,855) 2410,670 v1(2470,670) 2502.68,670
  Top Layer w20: U6.2@1454.88,389.76 1454.88,430.16 v3(1464.72,440)
  Top Layer w30: 1522.4,52.4 1550,80 1550,252.52 R37.1@1599.45,252.52 1600,251.97 v1(1600,250)
  Top Layer w39: C7.2@1467.74,52.4 1522.4,52.4
  other v1: 780,90 780,140 1930,160 2090,160 1560,250 1327.05,267.28 120,310 160,310 300,310 335,310 120,350 160,350 300,350 335,350 3176.06,404.27 648.88,525.52 2073.29,525.52 531.16,724.81 1955.57,724.81 1710,730 1512.92,807.06 2937.33,807.06 211.85,845 44.57,930 511.8,966.72 1936.21,966.72 197.68,1025 597.01,1170.66 2021.42,1170.66 1400.31,1225.44 2824.72,1225.44 735.99,1305.37 2160.4,1305.37 1235.84,1358.26 2660.25,1358.26 46.85,1390 1187.36,1527.4 2611.77,1527.4 1549.88,1597.01 2114.57,1720 684.57,1725
  other v3: 1710,1060 110,1118.07
HV_FB: R34.1 R37.2 U3.9 | length 495.3
  Top Layer w10: R34.1@1776.08,239.78 ccw(c1755.89,259.98) 1784.45,259.98 ; R34.1@1784.45,231.42 U3.9@1784.45,350.32 ; 1784.45,259.03 ccw(c1821.66,259.03) R34.1@1795.35,232.71 ; 1784.45,283.17 ccw(c1845.81,283.17) R34.1@1802.42,239.78
  Top Layer w30: R37.2@1670.32,252.52 1763.35,252.52 1784.45,231.42 R34.1@1789.25,226.61 ; R37.2@1674.63,241.12 cw(c1695.07,205.71) 1705.65,245.2 ; R37.2@1678.34,252.52 cw(c1678.34,143.26) R34.1@1755.6,220.52 ; 1750.76,252.52 cw(c1750.76,215.68) R34.1@1776.81,241.73
KEY: S2.2 U3.8 | length 1779.8
  Top Layer w6: U3.8@1756.75,376.89 cw(c1768.48,376.89) 1760.18,385.18 ; U3.8@1756.82,380.2 ccw(c1754.56,383.86) 1758.86,383.86 ; U3.8@1758.86,350.32 1758.86,383.86 ; U3.8@1760.9,380.2 cw(c1763.16,383.86) 1758.86,383.86 ; U3.8@1762.75,376.89 cw(c1788.96,376.89) v3@1770.43,395.43 ; 1763.27,383.03 cw(c1782.53,371.91) v3@1776.77,393.39 ; 1767.31,390.03 ccw(c1757.96,395.43) v3@1768.39,398.23 ; v3@1768.16,400 cw(c1751.64,400) 1763.32,388.32 cw(c1775,376.64) v3@1775,393.16 ; v3(1775,400) 1758.86,383.86
  Bottom Layer w6: v3(1775,400) 1815,440 3290,440 v3(3325,405) ; v3@1775,406.84 ccw(c1775,423.36) 1786.68,411.68 ccw(c1798.36,400) v3@1781.84,400 ; v3@3318.16,405 ccw(c3301.64,405) 3313.32,416.68 ccw(c3325,428.36) v3@3325,411.84
LED_B: R29.1 V1.18 V2.18 | length 2913.7
  Bottom Layer w6: V2.18@801.98,921.89 903.09,1023 3033,1023 3180,1170 v3(3314.25,1170) ; V2.18@801.98,930.39 ccw(c801.98,950.91) 816.49,936.4 ccw(c831,921.89) V2.18@810.48,921.89 ; V2.18@801.98,936.39 ccw(c801.98,971.4) 826.73,946.64 ccw(c851.48,921.89) V2.18@816.48,921.89 ; V1.18@2216.13,932.14 ccw(c2191.38,956.9) 2226.39,956.9 ccw(c2261.39,956.9) V1.18@2236.64,932.14 ; V1.18@2220.38,927.9 ccw(c2205.86,942.41) 2226.39,942.41 ccw(c2246.91,942.41) V1.18@2232.4,927.9 ; V1.18@2226.39,921.89 2226.39,1020.13 ; v3@3309.41,1165.16 ccw(c3297.73,1153.48) 3297.73,1170 ccw(c3297.73,1186.52) v3@3309.41,1174.84
LED_G: R28.1 V1.16 V2.16 | length 2492.1
  Bottom Layer w6: V2.16@1042.36,1097 cw(c1042.36,1062) 1067.11,1086.75 cw(c1091.87,1111.5) V2.16@1056.86,1111.5 ; V2.16@1042.36,1103 cw(c1042.36,1082.48) 1056.87,1096.99 cw(c1071.38,1111.5) V2.16@1050.86,1111.5 ; V2.16@1042.36,1111.5 1118.87,1035 2469.25,1035 ; V1.16@2456.52,1101.25 cw(c2431.77,1076.5) 2466.77,1076.5 cw(c2501.78,1076.5) V1.16@2477.02,1101.25 ; V1.16@2460.76,1105.49 cw(c2446.25,1090.98) 2466.77,1090.98 cw(c2487.29,1090.98) V1.16@2472.78,1105.49 ; V1.16@2466.77,1111.5 2466.77,1037.48 2469.25,1035 ; 3110.5,1136.25 ccw(c3081.75,1165) v3@3122.41,1165 ; 3120.74,1146.49 ccw(c3102.23,1165) v3@3128.41,1165 ; v3@3126.77,1158.62 cw(c3125.37,1155) 3129.25,1155 ; v3(3129.25,1165) 3129.25,1155 ; v3@3131.73,1158.62 ccw(c3133.14,1155) 3129.25,1155 ; 2469.25,1035 3009.25,1035 3129.25,1155
LED_R: R27.1 V1.14 V2.14 | length 2669.8
  Bottom Layer w6: V2.14@1218.48,856.89 ccw(c1245.31,856.89) 1226.33,837.92 ; V2.14@1221.98,856.89 1221.98,842.28 1309.25,755 1431.09,633.16 1662.84,633.16 ; V2.14@1224.48,856.89 ccw(c1265.79,856.89) 1236.58,827.67 ; V2.14@1230.48,856.89 ccw(c1286.28,856.89) 1246.82,817.43 ; V2.14@1236.48,856.89 ccw(c1306.76,856.89) 1257.06,807.19 ; 1664,632 1662.84,633.16 ; V1.14@2631.89,856.89 cw(c2596.88,856.89) 2621.63,832.14 cw(c2646.39,807.38) V1.14@2646.39,842.39 ; V1.14@2637.89,856.89 cw(c2617.36,856.89) 2631.88,842.38 cw(c2646.39,827.87) V1.14@2646.39,848.39 ; V1.14@2646.39,865.39 ccw(c2646.39,885.91) 2660.9,871.4 ccw(c2675.41,856.89) V1.14@2654.89,856.89 ; V1.14@2646.39,871.39 ccw(c2646.39,906.4) 2671.14,881.64 ccw(c2695.89,856.89) V1.14@2660.89,856.89 ; v3@3302.41,855 ccw(c3285.89,855) 3297.57,866.68 ccw(c3309.25,878.36) v3@3309.25,861.84 ; v3(3309.25,855) 3267.25,897 2686.5,897 V1.14@2646.39,856.89 2544.5,755 2118,755 1996.16,633.16 1662.84,633.16
LED_Y: R30.1 V1.20 V2.20 | length 2668.5
  Bottom Layer w6: V2.20@977.36,657 cw(c977.36,622) 1002.11,646.75 cw(c1026.87,671.5) V2.20@991.86,671.5 ; V2.20@977.36,663 cw(c977.36,642.48) 991.87,656.99 cw(c1006.38,671.5) V2.20@985.86,671.5 ; V2.20@977.36,671.5 1028.87,620 2219.25,620 2270.76,671.5 V1.20@2401.77,671.5 2419.04,671.5 2487.54,740 2594.25,740 2739.25,885 3099.25,885 v3(3129.25,855) ; V1.20@2391.52,661.25 ccw(c2366.77,636.5) 2366.77,671.5 ccw(c2366.77,706.51) V1.20@2391.52,681.76 ; V1.20@2395.76,665.49 ccw(c2381.25,650.98) 2381.25,671.5 ccw(c2381.25,692.02) V1.20@2395.76,677.51 ; V1.20@2401.77,668 ccw(c2401.77,701.25) 2425.28,677.74 ; V1.20@2401.77,674 ccw(c2401.77,721.74) 2435.52,687.98 ; V1.20@2401.77,680 ccw(c2401.77,742.22) 2445.77,698.23 ; V1.20@2401.77,686 ccw(c2401.77,762.71) 2456.01,708.47 ; v3@3122.41,855 ccw(c3105.89,855) 3117.57,866.68 ccw(c3129.25,878.36) v3@3129.25,861.84
LEDPWM_B: R25.1 U3.6 | length 2711.2
  Top Layer w6: v3@1702.41,395.16 cw(c1689.71,382.45) U3.6@1707.68,382.45 ; U3.6@1704.93,379.64 ccw(c1698.29,386.28) 1707.68,386.28 ccw(c1717.07,386.28) U3.6@1710.43,379.64 ; v3(1707.25,400) 1707.68,399.57 U3.6@1707.68,350.32 ; 1707.68,384.51 cw(c1722.74,384.51) v3@1712.09,395.16 ; v3@3257.41,800 ccw(c3240.89,800) 3252.57,811.68 ccw(c3264.25,823.36) v3@3264.25,806.84 ; v3(3264.25,800) 3242.25,822 3242.25,1338.43 R25.1@3308.82,1405 ; 3266.89,1363.08 cw(c3308.82,1321.15) R25.1@3308.82,1380.44 ; 3276.4,1372.58 ccw(c3247.92,1401.06) R25.1@3288.2,1401.06 ; 3277.14,1373.32 cw(c3308.82,1341.64) R25.1@3308.82,1386.44 ; R25.1@3286.64,1382.82 ccw(c3268.4,1401.06) R25.1@3294.2,1401.06 ; R25.1@3287.38,1383.56 cw(c3308.82,1362.12) R25.1@3308.82,1392.44
  Bottom Layer w6: v3(1707.25,400) 1771.25,464 2964,464 3264.25,764.25 v3(3264.25,800) ; v3@1707.25,406.84 ccw(c1707.25,423.36) 1718.93,411.68 ccw(c1730.61,400) v3@1714.09,400 ; v3@3259.41,795.16 cw(c3247.73,783.48) 3264.25,783.48 cw(c3280.77,783.48) v3@3269.09,795.16
LEDPWM_G: R24.1 U3.3 | length 2891.2
  Top Layer w6: U3.3@1628.16,379.64 ccw(c1621.51,386.28) 1630.91,386.28 ccw(c1640.3,386.28) U3.3@1633.66,379.64 ; U3.3@1630.91,350.32 1630.91,393.65 ; U3.3@1630.91,366.74 cw(c1672.51,366.74) v3@1643.09,396.16 ; U3.3@1630.91,381.23 cw(c1658.02,381.23) v3@1638.85,400.4 ; v3@1631.9,398.47 cw(c1627.75,396.81) 1630.91,393.65 ; v3@1635.72,394.64 ccw(c1634.06,390.5) 1630.91,393.65 ; v3(1638.25,401) 1630.91,393.65 ; 3086.89,1363.08 cw(c3128.82,1321.15) R24.1@3128.82,1380.44 ; 3096.4,1372.58 ccw(c3067.92,1401.06) R24.1@3108.2,1401.06 ; 3097.14,1373.32 cw(c3128.82,1341.64) R24.1@3128.82,1386.44 ; R24.1@3106.64,1382.82 ccw(c3088.4,1401.06) R24.1@3114.2,1401.06 ; R24.1@3107.38,1383.56 cw(c3128.82,1362.12) R24.1@3128.82,1392.44 ; R24.1@3128.82,1405 3074.25,1350.43 3074.25,810 3124.25,760 v3(3224.25,760) ; v3@3219.41,755.16 ccw(c3207.73,743.48) 3207.73,760 ccw(c3207.73,776.52) v3@3219.41,764.84
  Bottom Layer w6: v3(1638.25,401) 1725.25,488 2923,488 3195,760 v3(3224.25,760) ; v3@1638.25,407.84 ccw(c1638.25,424.36) 1649.93,412.68 ccw(c1661.61,401) v3@1645.09,401 ; v3@3219.41,755.16 ccw(c3207.73,743.48) 3207.73,760 ccw(c3207.73,776.52) v3@3219.41,764.84
LEDPWM_R: R23.1 U3.2 | length 2434.8
  Top Layer w6: v3@1600.48,396.22 cw(c1588.8,384.54) 1605.32,384.54 cw(c1621.83,384.54) v3@1610.15,396.22 ; U3.2@1602.56,379.64 ccw(c1595.92,386.28) 1605.31,386.28 ccw(c1614.71,386.28) U3.2@1608.07,379.64 ; U3.2@1605.32,350.32 v3(1605.32,401.06) ; v3@3257.46,870.79 ccw(c3246.34,872.09) 3254.25,880 ; v3@3263.46,876.8 cw(c3262.17,887.91) 3254.25,880 ; v3(3264.25,870) 3254.25,880 ; 3266.89,1048.08 cw(c3308.82,1006.15) R23.1@3308.82,1065.44 ; 3276.4,1057.58 ccw(c3247.92,1086.06) R23.1@3288.2,1086.06 ; 3277.14,1058.32 cw(c3308.82,1026.64) R23.1@3308.82,1071.44 ; R23.1@3286.64,1067.82 ccw(c3268.4,1086.06) R23.1@3294.2,1086.06 ; R23.1@3287.38,1068.56 cw(c3308.82,1047.12) R23.1@3308.82,1077.44 ; R23.1@3308.82,1090 3254.25,1035.43 3254.25,880
  Bottom Layer w6: v3(1605.32,401.06) 1704.25,500 2918.03,500 3264.25,846.22 v3(3264.25,870) ; v3@1605.32,407.91 ccw(c1605.32,424.42) 1617,412.74 ccw(c1628.68,401.06) v3@1612.16,401.06 ; v3@3259.41,865.16 cw(c3247.73,853.48) 3264.25,853.48 cw(c3280.77,853.48) v3@3269.09,865.16
LEDPWM_Y: R26.1 U3.7 | length 2623.9
  Top Layer w6: U3.7@1730.52,379.64 ccw(c1723.88,386.28) 1733.27,386.28 ccw(c1742.66,386.28) U3.7@1736.02,379.64 ; U3.7@1733.27,350.32 1733.27,391.02 ; U3.7@1733.27,363.2 cw(c1777.05,363.2) v3@1746.09,394.16 ; U3.7@1733.27,377.69 cw(c1762.56,377.69) v3@1741.85,398.4 ; 1733.27,392.18 cw(c1748.08,392.18) v3@1737.61,402.65 ; v3@1734.72,396.95 cw(c1729.1,395.18) 1733.27,391.02 ; v3@1739.2,392.47 ccw(c1737.44,386.85) 1733.27,391.02 ; v3(1741.25,399) 1733.27,391.02 ; 3086.89,1048.08 cw(c3128.82,1006.15) R26.1@3128.82,1065.44 ; 3096.4,1057.58 ccw(c3067.92,1086.06) R26.1@3108.2,1086.06 ; 3097.14,1058.32 cw(c3128.82,1026.64) R26.1@3128.82,1071.44 ; R26.1@3106.64,1067.82 ccw(c3088.4,1086.06) R26.1@3114.2,1086.06 ; R26.1@3107.38,1068.56 cw(c3128.82,1047.12) R26.1@3128.82,1077.44 ; R26.1@3128.82,1090 3086.25,1047.43 3086.25,820 3125.25,781 v3(3302.25,781) ; v3@3297.41,776.16 ccw(c3285.73,764.48) 3285.73,781 ccw(c3285.73,797.52) v3@3297.41,785.84
  Bottom Layer w6: v3(1741.25,399) 1794.25,452 2974.25,452 v3@3303.25,781 ; v3@1741.25,405.84 ccw(c1741.25,422.36) 1752.93,410.68 ccw(c1764.61,399) v3@1748.09,399 ; 3289.86,767.61 ccw(c3276.48,781) v3@3295.41,781 ; 3292.28,770.03 cw(c3302.25,760.05) v3@3302.25,774.16
N1_0: R3.2 U1.15 | length 1761.1
  Top Layer w6: 1962.54,476.83 cw(c1962.54,417.54) R3.2@2004.46,459.47 ; 1975.98,476.83 ccw(c1975.98,517.12) R3.2@2004.46,488.63 ; 1977.02,476.83 cw(c1977.02,432.03) R3.2@2008.7,463.71 ; R3.2@1990.46,476.83 ccw(c1990.46,502.63) R3.2@2008.7,484.39 ; R3.2@1991.51,476.83 cw(c1991.51,446.51) R3.2@2012.95,467.95 ; R3.2@2021.83,476.83 1960.57,476.83 1806.77,630.63 1806.77,1188.86 2239.8,1621.89 2288.77,1621.89 2311.77,1644.89 2311.77,1671.89 ; U1.15@2305.54,1678.65 cw(c2290.5,1663.61) 2311.77,1663.61 cw(c2333.04,1663.61) U1.15@2318,1678.65 ; U1.15@2308.51,1676.7 cw(c2306.6,1671.89) 2311.77,1671.89 ; U1.15@2315.03,1676.7 ccw(c2316.94,1671.89) 2311.77,1671.89
N1_1: R4.2 U1.9 | length 1937.7
  Top Layer w6: U1.9@2605.54,1678.65 cw(c2590.5,1663.61) 2611.77,1663.61 cw(c2633.04,1663.61) U1.9@2618,1678.65 ; U1.9@2611.77,1716.38 2611.77,1635.83 3062.25,1185.35 3062.25,728 3014.25,680 2794.25,680 2674.25,800 R4.2@2659.69,800 ; R4.2@2659.69,775.44 cw(c2659.69,680.98) 2726.48,747.77 ; R4.2@2659.69,781.44 cw(c2659.69,701.47) 2716.23,758.02 ; R4.2@2659.69,787.44 cw(c2659.69,721.95) 2705.99,768.26 ; R4.2@2659.69,793.44 cw(c2659.69,742.44) 2695.75,778.5 ; R4.2@2659.69,799.44 cw(c2659.69,762.92) 2685.51,788.75
N1_2: R5.2 U1.7 | length 1247
  Top Layer w6: U1.7@2561.77,1487.09 cw(c2561.77,1470.69) 2573.37,1482.29 ; U1.7@2561.77,1527.4 2561.77,1493.89 2580.77,1474.89 2755.74,1474.89 3050.25,1180.38 3050.25,840.43 R5.2@3005.94,796.12 ; U1.7@2570.58,1495.91 ccw(c2596.72,1495.91) 2578.24,1477.42 ; R5.2@3009.75,809.72 ccw(c3009.75,833.38) 3026.48,816.65 ; R5.2@3009.75,815.72 ccw(c3009.75,853.86) 3036.72,826.89 ; R5.2@3018.37,795.1 cw(c3050.82,795.1) 3027.87,818.05 ; R5.2@3024.37,795.1 cw(c3071.31,795.1) 3038.12,828.29 ; R5.2@3030.37,795.1 cw(c3091.79,795.1) 3048.36,838.53
N1_3: R6.2 U1.6 | length 1010.8
  Top Layer w6: U1.6@2511.77,1527.4 2511.77,1486.89 2535.77,1462.89 2750.77,1462.89 2987.6,1226.06 R6.2@2987.6,1056.12 ; U1.6@2514.58,1495.91 ccw(c2543.13,1495.91) 2522.95,1475.72 ; U1.6@2520.58,1495.91 ccw(c2563.62,1495.91) 2533.19,1465.47 ; R6.2@2976.82,1071.72 ccw(c2950.8,1097.74) 2987.6,1097.74 ; R6.2@2981.06,1067.47 ccw(c2965.28,1083.25) 2987.6,1083.25 ; 2987.6,1087.13 ccw(c3021.4,1087.13) R6.2@2997.5,1063.23 ; 2987.6,1101.62 ccw(c3035.88,1101.62) R6.2@3001.74,1067.47 ; 2987.6,1116.1 ccw(c3050.37,1116.1) R6.2@3005.99,1071.72
N1_4: R7.2 U1.5 | length 803.8
  Top Layer w6: U1.5@2457.95,1487.97 cw(c2455.03,1481.89) 2461.77,1481.89 ; U1.5@2458.58,1495.91 ccw(c2484.72,1495.91) 2466.24,1477.42 ; U1.5@2461.77,1527.4 2461.77,1481.89 ; U1.5@2464.58,1495.91 ccw(c2505.21,1495.91) 2476.48,1467.18 ; U1.5@2465.59,1487.97 ccw(c2468.51,1481.89) 2461.77,1481.89 ; U1.5@2470.58,1495.91 ccw(c2525.69,1495.91) 2486.72,1456.94 ; R7.2@2877.88,1279.13 ccw(c2850.91,1306.1) 2889.05,1306.1 ; R7.2@2882.13,1274.88 ccw(c2865.4,1291.61) 2889.05,1291.61 ; R7.2@2889.05,1262.58 2889.05,1307.64 ; 2889.05,1296.88 ccw(c2912.43,1296.88) R7.2@2900.15,1276.98 ; R7.2@2903.3,1282.09 cw(c2919.08,1307.63) 2889.05,1307.63 ; 2461.77,1481.89 2492.77,1450.89 2745.8,1450.89 2889.05,1307.64
N1_5: R8.2 U1.4 | length 494.8
  Top Layer w6: U1.4@2411.77,1487.09 cw(c2411.77,1463.45) 2428.49,1480.17 ; U1.4@2411.77,1527.4 2411.77,1496.89 2469.77,1438.89 2679.77,1438.89 ; U1.4@2420.58,1495.91 ccw(c2439.48,1495.91) 2426.12,1482.54 ; R8.2@2685.31,1412.28 ccw(c2662.24,1421.36) 2679.77,1438.89 ; 2685.4,1433.26 ccw(c2704.5,1452.37) R8.2@2704.5,1425.35 ; 2686.25,1432.42 cw(c2671.53,1417.7) R8.2@2690.89,1410.08 ; R8.2@2692.72,1425.94 cw(c2680.82,1414.05) R8.2@2696.48,1407.89 ; R8.2@2711.72,1406.94 2679.77,1438.89
N1_6: R9.2 U1.3 | length 555.9
  Top Layer w6: R9.2@2104.35,1374.2 ccw(c2086.57,1391.98) 2111.72,1391.98 ; R9.2@2111.72,1356.83 2111.72,1416.83 ; 2111.72,1392.17 ccw(c2144.46,1392.17) R9.2@2124.25,1366.4 ; 2111.72,1404.5 ccw(c2154.13,1404.5) R9.2@2127.96,1371.12 ; R9.2@2131.66,1375.85 cw(c2163.81,1416.83) 2111.72,1416.83 ; 2336.51,1476.63 cw(c2361.77,1451.38) U1.3@2361.77,1487.09 ; 2346.76,1486.88 cw(c2361.77,1471.86) U1.3@2361.77,1493.09 ; 2350.96,1491.08 ccw(c2346.14,1495.91) U1.3@2352.96,1495.91 ; U1.3@2361.77,1527.4 2361.77,1501.89 2317.77,1457.89 2152.77,1457.89 2111.72,1416.83
N1_7: R10.2 U1.2 | length 744.5
  Top Layer w6: 1934.55,1225.7 ccw(c1956.11,1247.26) R10.2@1962.56,1217.46 ; 1936.49,1223.77 cw(c1915.9,1203.17) R10.2@1945.02,1203.17 ; 1942.34,1217.92 ccw(c1958.88,1234.47) R10.2@1963.82,1211.6 ; R10.2@1959.06,1201.2 1926.77,1233.49 ; R10.2@1961.29,1223.33 cw(c1953.34,1260.06) 1926.77,1233.49 ; 2293.89,1474.01 ccw(c2271.99,1495.91) U1.2@2302.96,1495.91 ; 2303.59,1483.7 cw(c2311.77,1475.52) U1.2@2311.77,1487.09 ; 2304.13,1484.25 ccw(c2292.48,1495.91) U1.2@2308.96,1495.91 ; U1.2@2311.77,1527.4 2311.77,1491.89 2289.77,1469.89 2144.77,1469.89 1926.77,1251.89 1926.77,1233.49
N1_8: R11.2 U1.1 | length 997.1
  Top Layer w6: 1833.35,1021.92 ccw(c1863.8,1052.37) R11.2@1863.8,1009.3 ; 1839.91,1015.35 cw(c1817.16,992.6) R11.2@1849.23,989.91 ; R11.2@1843.25,990.41 ccw(c1800.29,994.01) 1830.77,1024.49 ; 1843.59,1011.68 ccw(c1863.8,1031.88) R11.2@1863.8,1003.3 ; R11.2@1867.6,987.66 1830.77,1024.49 ; 2243.83,1488.95 cw(c2255.94,1476.84) U1.1@2260.95,1493.22 ; U1.1@2259.19,1487.48 ccw(c2252.63,1466.03) 2236.77,1481.89 ; U1.1@2261.77,1486.89 U1.1@2261.77,1527.4 2261.77,1506.89 2236.77,1481.89 ; 1830.77,1024.49 1830.77,1175.89 2136.77,1481.89 2236.77,1481.89
N1_9: R12.2 U1.14 | length 1580.3
  Top Layer w6: 1827.95,740.71 ccw(c1875.53,788.29) R12.2@1880.96,721.22 ; 1837.13,731.53 ccw(c1876.91,771.31) R12.2@1881.44,715.24 ; 1846.3,722.36 ccw(c1878.28,754.33) R12.2@1881.93,709.26 ; 1855.48,713.18 ccw(c1879.66,737.35) R12.2@1882.41,703.28 ; R12.2@1880.48,727.2 cw(c1874.16,805.27) 1818.77,749.89 ; R12.2@1885.94,707.66 1861,707.66 1818.77,749.89 ; U1.14@2356.37,1677.92 cw(c2347.81,1666.89) 2361.77,1666.89 ; U1.14@2361.77,1716.38 2361.77,1666.89 ; U1.14@2367.17,1677.92 ccw(c2375.73,1666.89) 2361.77,1666.89 ; 1818.77,749.89 1818.77,1183.89 2244.77,1609.89 2304.77,1609.89 2361.77,1666.89
N1_A: U1.10 U5.15 | length 1276
  Top Layer w6: 1831.41,1455.99 ccw(c1849.88,1474.46) U5.15@1849.88,1448.34 ; 1836.26,1451.14 cw(c1824.65,1439.53) U5.15@1841.07,1439.53 ; U5.15@1849.88,1408.03 1849.88,1437.52 1774.88,1512.52 1774.88,1672.52 1907.88,1805.52 2531.88,1805.52 2561.77,1775.63 U1.10@2561.77,1716.38 ; U1.10@2555.54,1754.1 ccw(c2540.5,1769.15) 2561.77,1769.15 ccw(c2583.04,1769.15) U1.10@2568,1754.1
N1_B: U1.13 U5.1 | length 716.6
  Top Layer w6: U5.1@1894.19,1635.23 ccw(c1883.77,1647.52) 1899.88,1647.52 ; U5.1@1899.88,1597.01 1899.88,1647.52 ; U5.1@1905.58,1635.23 cw(c1915.99,1647.52) 1899.88,1647.52 ; U1.13@2406.44,1754.89 ccw(c2398.29,1765.63) 2411.77,1765.63 ; U1.13@2411.77,1716.38 2411.77,1765.63 ; U1.13@2417.1,1754.89 cw(c2425.26,1765.63) 2411.77,1765.63 ; 1899.88,1647.52 2021.88,1769.52 2407.88,1769.52 2411.77,1765.63
N1_C: U1.12 U5.2 | length 826.5
  Top Layer w6: U5.2@1844.19,1635.23 ccw(c1833.77,1647.52) 1849.88,1647.52 ; U5.2@1849.88,1597.01 1849.88,1647.52 ; U5.2@1855.58,1635.23 cw(c1865.99,1647.52) 1849.88,1647.52 ; U1.12@2456.44,1754.89 ccw(c2448.29,1765.63) 2461.77,1765.63 ; U1.12@2461.77,1716.38 2461.77,1765.63 ; U1.12@2467.1,1754.89 cw(c2475.26,1765.63) 2461.77,1765.63 ; 1849.88,1647.52 1983.88,1781.52 2445.88,1781.52 2461.77,1765.63
N1_D: U1.11 U5.3 | length 957.2
  Top Layer w6: U5.3@1794.19,1635.23 ccw(c1783.77,1647.52) 1799.88,1647.52 ; U5.3@1799.88,1597.01 1799.88,1647.52 ; U5.3@1805.58,1635.23 cw(c1815.99,1647.52) 1799.88,1647.52 ; 2491.25,1776.16 cw(c2462.96,1747.87) U1.11@2502.96,1747.87 ; 2501.49,1765.91 cw(c2483.45,1747.87) U1.11@2508.96,1747.87 ; U1.11@2511.77,1716.38 2511.77,1755.63 2473.88,1793.52 1945.88,1793.52 1799.88,1647.52